# Altium PCB cameras.PcbDoc
Units mm, origin at the board's own origin, x right, y up, seen from the top; angles counter-clockwise.
Board outline 38 x 38 mm, 2 copper layers (Top Layer, Bottom Layer), stack 1.571 mm thick; 2 components, 6 nets, 22 pads, 0 vias.
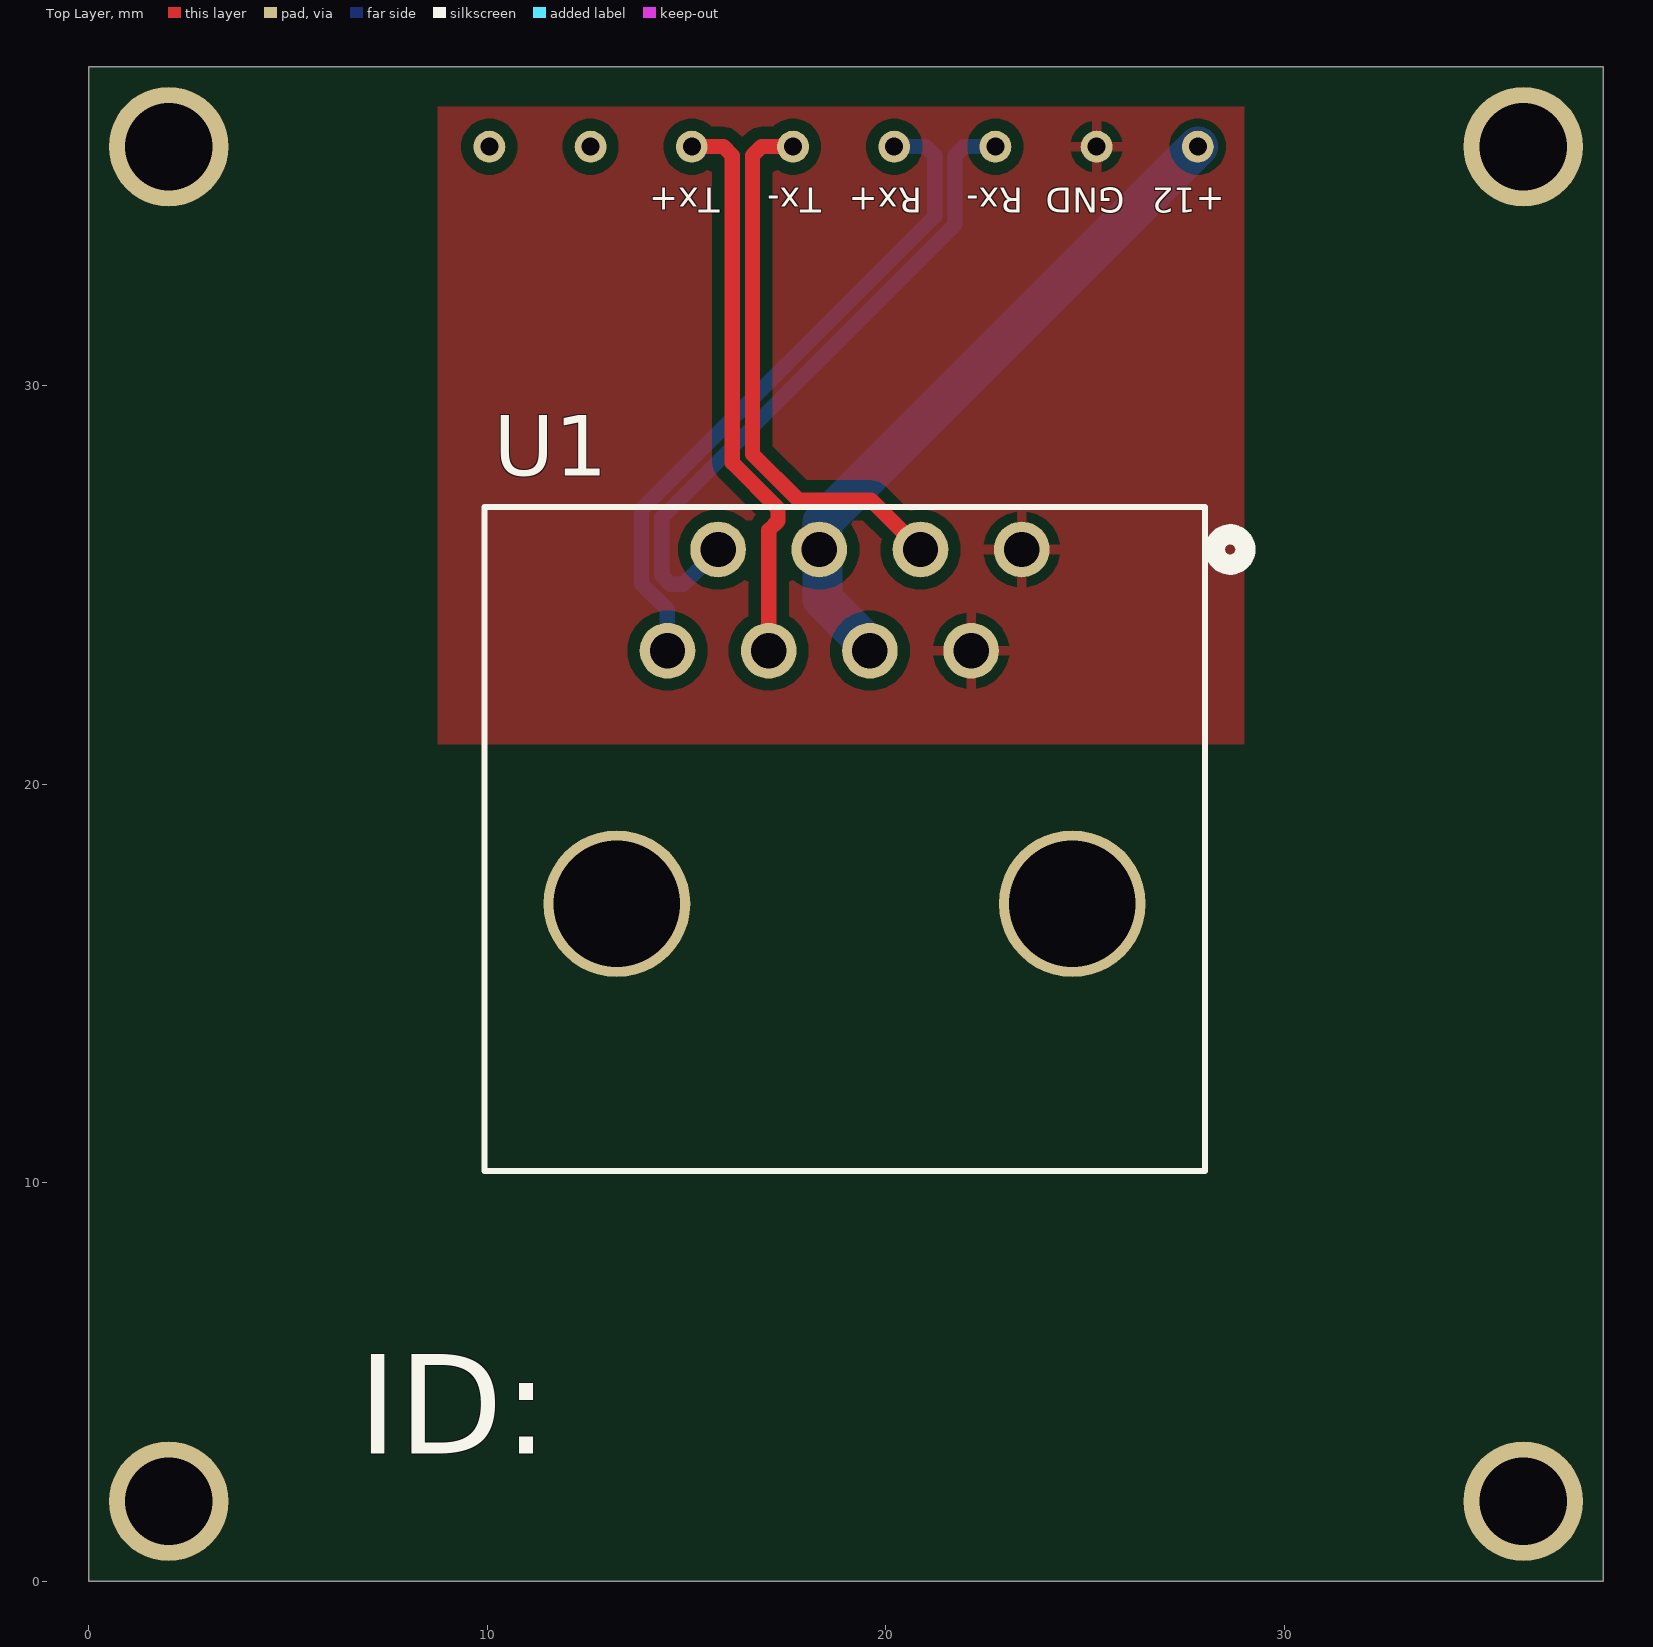
[diagram p0: Top Layer view]
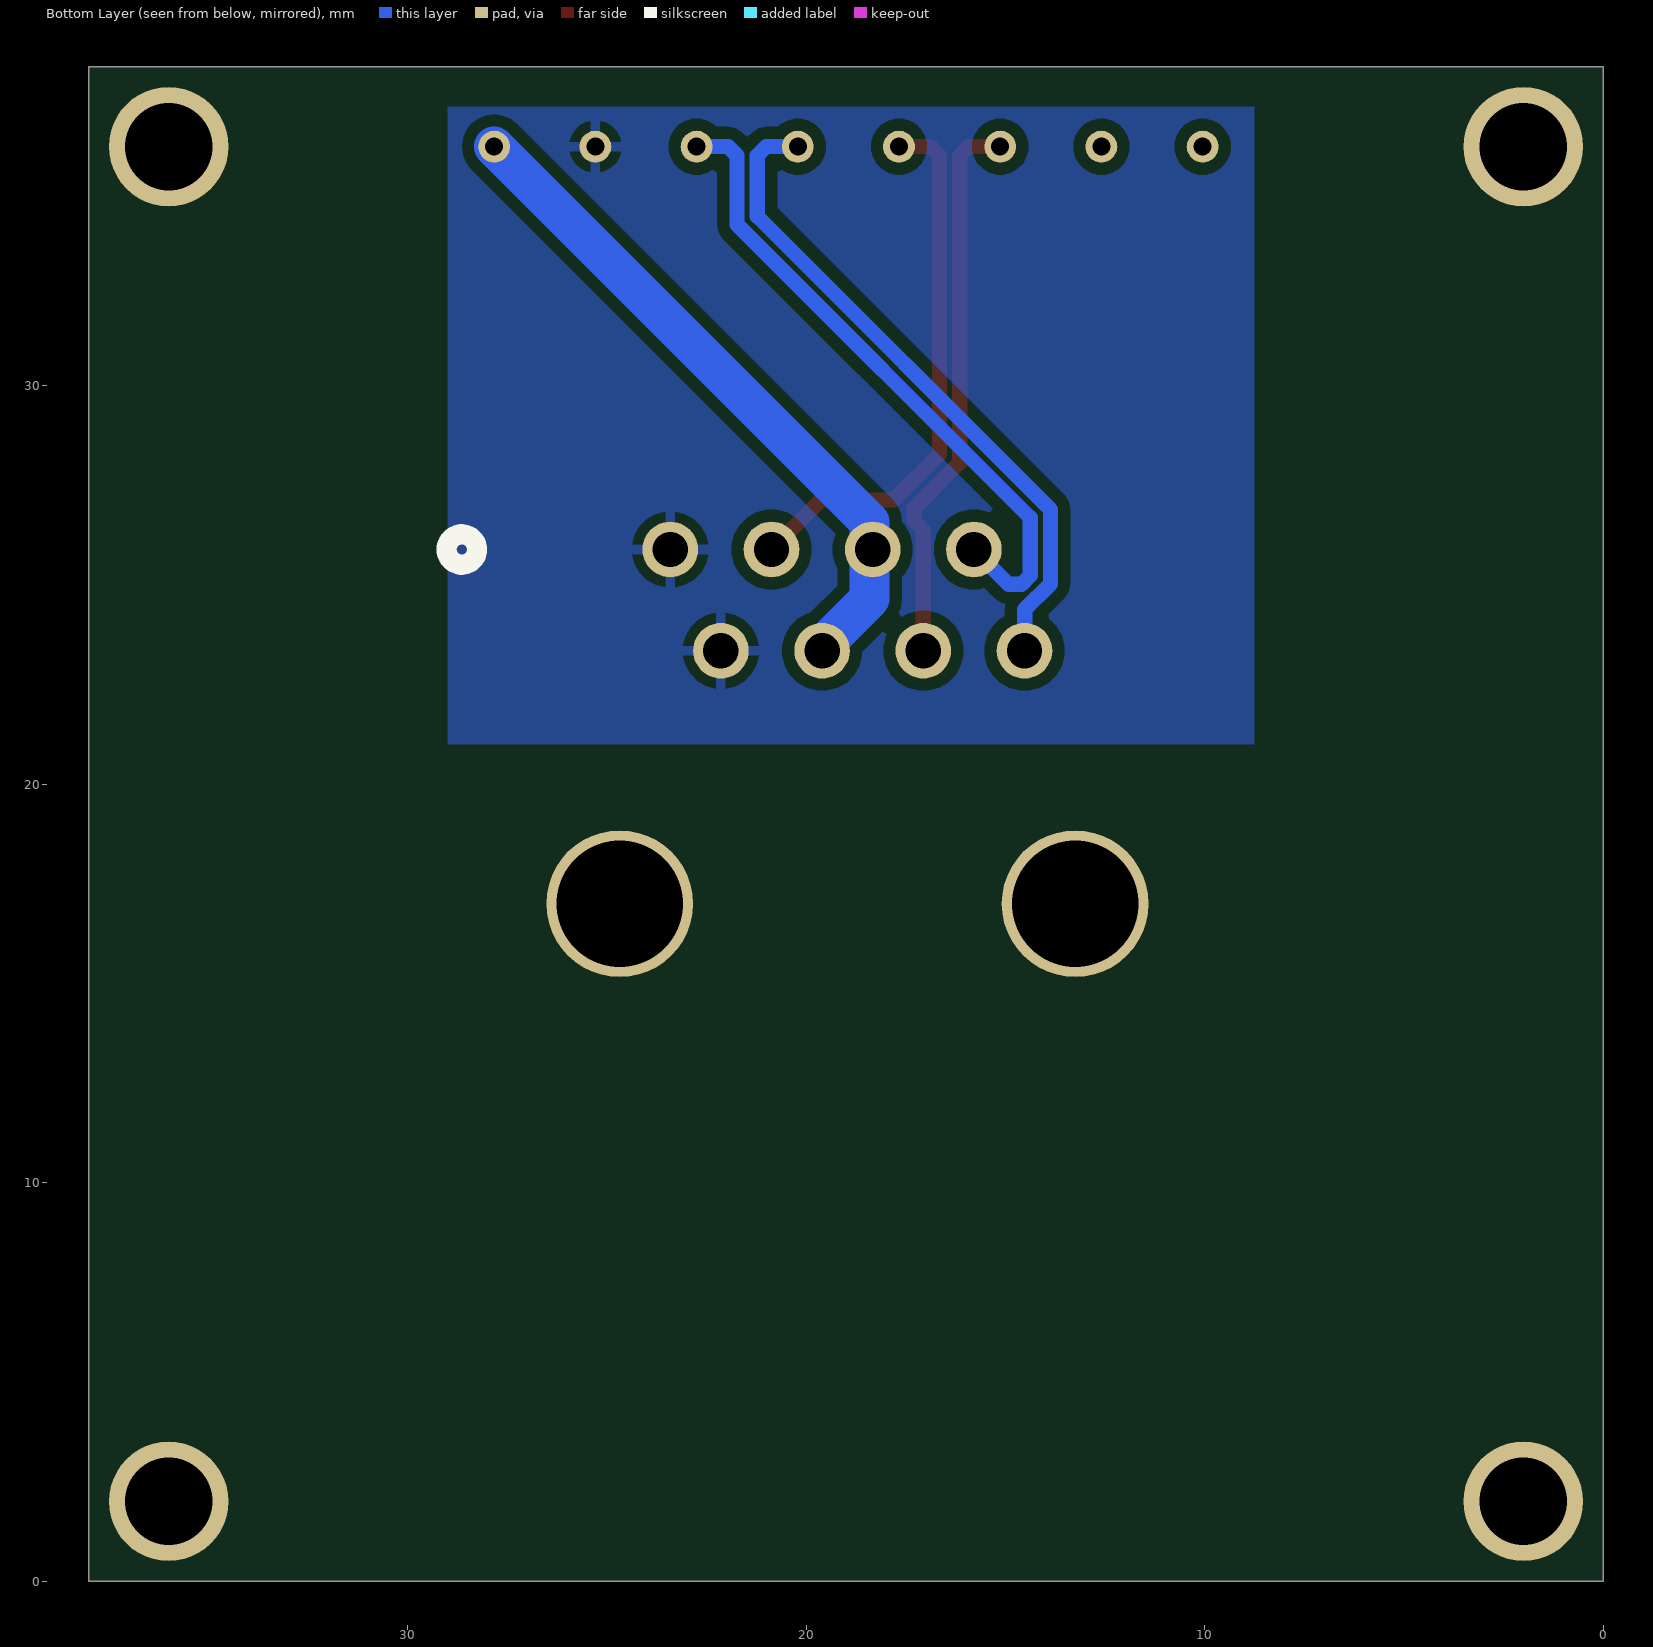
[diagram p1: Bottom Layer view, seen from below]

## Layer stack, top to bottom
Top Solder: solder mask 0.0102, Solder Resist, Dk 3.5
Top Layer: signal copper 0.0356
Dielectric 1: dielectric 1.5, FR-4, Dk 4.8
Bottom Layer: signal copper 0.0356
Bottom Solder: solder mask 0.0102, Solder Resist, Dk 3.5

## Board outline
0,0 0,38 38,38 38,0

## Design rules (kind name [scope] priority, off if disabled: settings)
BoardOutlineClearance [All] p1: gap=0.2 ignorepadtopadclearanceinfootprint=FALSE
Clearance [All] p1: gap=0.3 ignorepadtopadclearanceinfootprint=FALSE except(0.1: Arc-SMDPad Track-SMDPad; 0.12: Arc-Arc Arc-Track Arc-Text Arc-Hole Track-Track Track-Text Track-Hole SMDPad-THPad SMDPad-Via SMDPad-Text SMDPad-Hole THPad-THPad THPad-Via THPad-Text THPad-Hole Via-Via Via-Text Fill-Text Fill-Hole Poly-Text Poly-Hole Region-Text Region-Hole Text-Text Text-Hole; 0.15: SMDPad-SMDPad; 0.2: Arc-Via Track-Via Via-Hole; 0.35: Arc-THPad Track-THPad)
ComponentClearance [All] p1: gap=0.01 collisioncheckmode=3 verticalgap=0.01 showdistances=FALSE
DiffPairsRouting [All] p1: maxlimit=0.127 minlimit=0.127 mostfreqgap=0.127 toplayer_minwidth=0.197 toplayer_maxwidth=1 toplayer_prefwidth=0.25 bottomlayer_minwidth=0.197 bottomlayer_maxwidth=1 bottomlayer_prefwidth=0.25 impedanceprofiledriven=TRUE maxuncoupledlength=20
HoleSize [All] p1: absolutevalues=TRUE maxlimit=6.3 minlimit=0.15 maxpercent=80.000 minpercent=20.000
MinimumAnnularRing [All] p1: minimumring=0.025
MinimumSolderMaskSliver [All] p1: minsoldermaskwidth=0.1
PolygonConnect [All] p1: connectstyle=Relief reliefconductorwidth=0.254 reliefentries=4 polygonreliefangle="90 Angle" airgapwidth=0.254
RoutingVias [All] p1: holewidth=0.3 width=0.45 viastyle="Through Hole" minholewidth=0.15 minwidth=0.25 maxholewidth=6.3 maxwidth=6.5
SilkToSolderMaskClearance [IsPad] p1: minsilkscreentomaskgap=0.15 clearancetoexposedcopper=TRUE
SolderMaskExpansion [All] p1: expansion=0.038 istentingtop=FALSE
SupplyNets "Schematic Supply Nets" [InNet('+12')] p1: voltage=0.000
SupplyNets "Schematic Supply Nets_2" [InNet('GND')] p2: voltage=0.000
Width [All] p1: maxlimit=2 minlimit=0.16 preferedwidth=0.254 minimp=50.000000 maximp=50.000000 favimp=50.000000
25 further rules are at their usual default settings.

## Classes and differential pairs
differential pair Tx: +Tx_P -Tx_N
differential pair Rx: +Rx_P -Rx_N

## Components (designator, comment, footprint, x,y, rotation, side; value= is the part's Value field where it differs from the comment)
U1 "MTJ-883X1" CONN_MTJ-883X1_ADM 23.41,25.89 r0 top
? "Camera Pinout" PCBComponent_1 15.13,36 r90 top

## Footprints (in the part's own frame and the unit in brackets; to place one, negate y for a bottom-side part, rotate by r counter-clockwise, add the part's x,y. Pads: shape width x height; smd on the part's side, far side on the other; paste and mask are expansions set on the pad)
CONN_MTJ-883X1_ADM [mil]
  round 55 / inner round 60 / far side round 55 hole 35 paste-99999 mask+0: 1(-350,-100) 2(-300,0) 3(-250,-100) 4(-200,0) 5(-150,-100) 6(-100,0) 7(-50,-100) 8(0,0)
  round 145 / inner round 60 / far side round 145 hole 125 paste-99999 mask-72.5: 9(-400,-350) 10(50,-350)
  silkscreen extent -531,-614 221,42
PCBComponent_1 [mm]
  round 0.8 hole 0.45: 1(0,5.08) 2(0,2.54) 3(0,0) 4(0,-2.54) 5(0,-5.08) 6(0,-7.62) 7(0,-10.16) 8(0,-12.7)

## Part data
U1: "No Description Available", Mfr_Name="ADAM TECHNOLOGIES INC", RefDes=RefDes, Type=Type
?: library part Component_1

## Free pads (board coordinates)
  round 3 hole 2.2: MP1(2,2) MP2(36,2) MP3(36,36) MP4(2,36)

## Nets (pads, with @x,y where several pads share a name; then routed paths per layer and width w, separated by ;. In a path a pad name is that pad's centre, name@x,y a point inside that pad or via, vN(x,y) a via of type N, cw(c..) or ccw(c..) an arc to the next point about the centre after c; other vN are vias at no path point)
+12: ?.8 U1.4 U1.5 | length 17.1
  Bottom Layer w1: U1.5 19.6,23.457 18.406,24.651 18.406,25.814 U1.4 18.406,25.966 18.406,26.576 ?.8
GND: ?.7 U1.7 U1.8
Rx_N: ?.6 U1.2 | length 16.6
  Bottom Layer w0.381: U1.2 14.915,25.015 14.599,25.015 14.376,25.238 14.376,26.686 21.734,34.044 21.734,35.777 21.957,36 ?.6
Rx_P: ?.5 U1.1 | length 16.9
  Bottom Layer w0.381: U1.1 14.516,23.354 14.516,24.38 13.868,25.028 13.868,26.897 21.226,34.254 21.226,35.777 21.003,36 ?.5
Tx_N: ?.4 U1.6 | length 13.8
  Top Layer w0.381: ?.4 16.877,36 16.654,35.777 16.654,28.279 17.804,27.129 19.631,27.129 U1.6
Tx_P: ?.3 U1.3 | length 14.1
  Top Layer w0.381: ?.3 15.923,36 16.146,35.777 16.146,28.069 17.293,26.921 17.293,26.606 17.06,26.372 U1.3
pads on no net: ?.1 ?.2 U1.9 U1.10

## Polygon pours and split planes (outlines as drawn)
GND on Bottom Layer "GND_L02_P000" (solid, pour order 0): 8.75,37 29,37 29,21 8.75,21
GND on Top Layer "GND_L01_P001" (solid, pour order 1): 8.75,37 29,37 29,21 8.75,21

## Silkscreen, mask and mechanical layers (free items; w line width, h text height)
Top Overlay:
  text "Tx+" at 15.833,34.966 h0.64 r180
  text "Tx-" at 18.373,34.966 h0.64 r180
  text "Rx+" at 20.913,34.966 h0.64 r180
  text "Rx-" at 23.453,34.966 h0.64 r180
  text "GND" at 25.993,34.966 h0.64 r180
  text "+12" at 28.506,34.966 h0.64 r180
  text "ID:" at 6.751,3.2 h2.5